# EAGLE board surfboard (EAGLE 4.16)
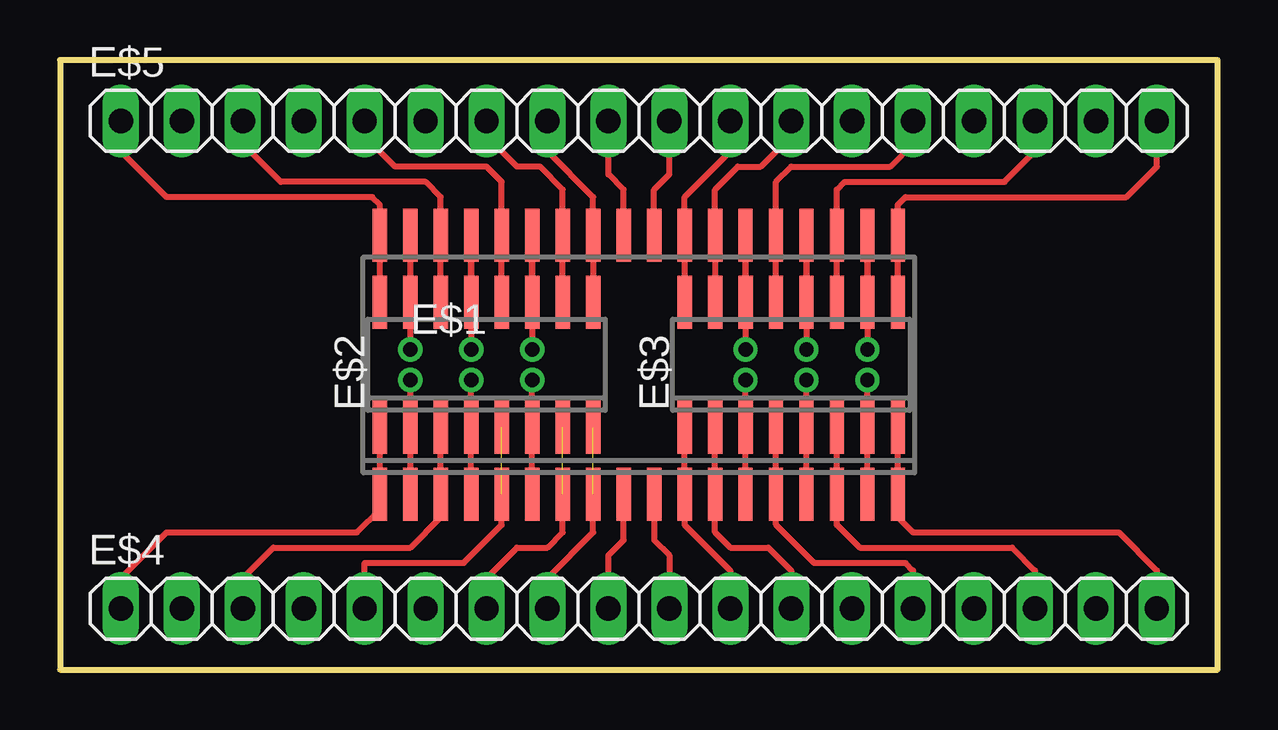
[diagram p0: board, top side]
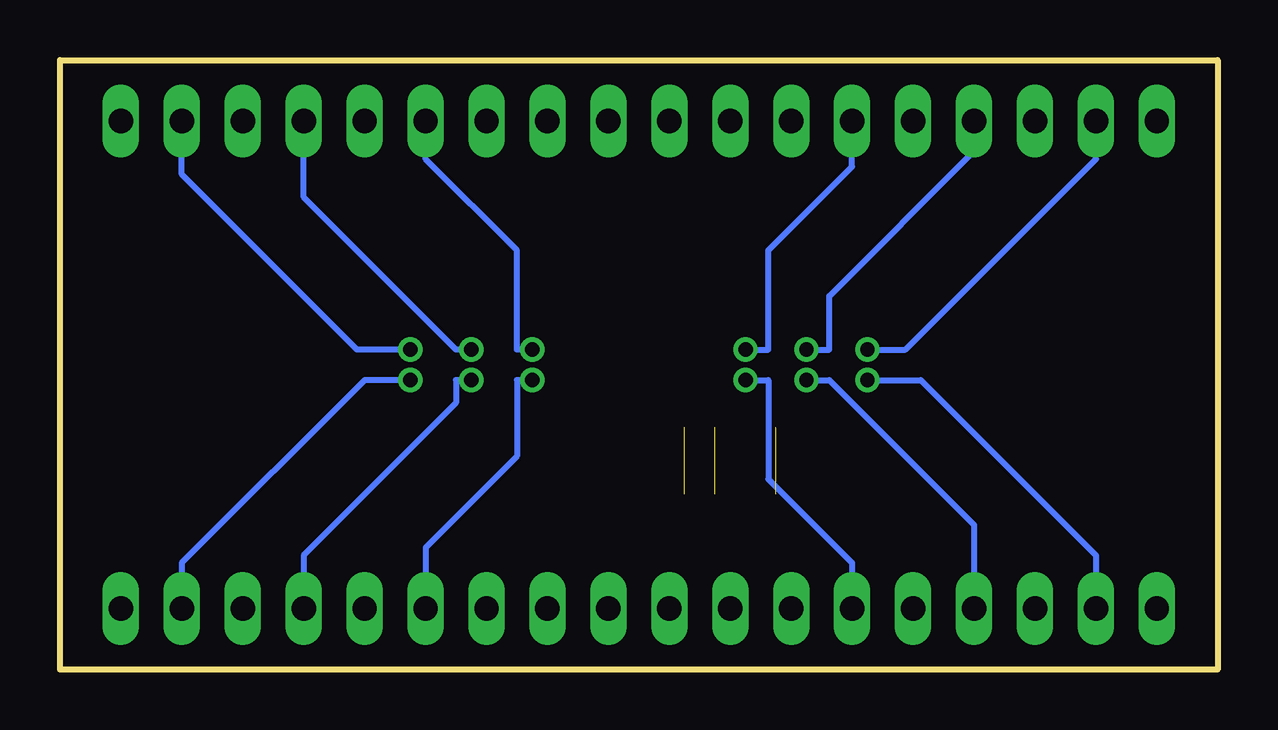
[diagram p1: board, bottom side, seen from below]

Size 48.26 x 25.4 mm. Coordinates in mm from the lower left corner, seen from the top.
Outline: 0,0 48.26,0 48.26,25.4 0,25.4 0,0
Copper layers (1*16): Top 0.035mm / dielectric 1.5mm / Bottom 0.035mm
Design rules "default": minimum track width 10mil, minimum drill 24mil, track to track 8mil, track to pad 8mil, pad to pad 8mil, via to via 8mil, smd to smd 8mil, copper to edge 40mil, drill to drill 8mil, minimum pad ring 10mil, minimum via ring 8mil, stop-mask expansion 4mil, vias tented up to drill 0mil, thermal gap 10mil

## Footprints (pad centres in the part's own frame; a part is rotated, then mirrored left to right if it is on the bottom)
SO36X = smd 0.6 x 2.2: 1 -10.795,-5.4; 2 -9.525,-5.4; 3 -8.255,-5.4; 4 -6.985,-5.4; 5 -5.715,-5.4; 6 -4.445,-5.4; 7 -3.175,-5.4; 8 -1.905,-5.4; 9 -0.635,-5.4; 10 0.635,-5.4; 11 1.905,-5.4; 12 3.175,-5.4; 13 4.445,-5.4; 14 5.715,-5.4; 15 6.985,-5.4; 16 8.255,-5.4; 17 9.525,-5.4; 18 10.795,-5.4; 19 10.795,5.4; 20 9.525,5.4; 21 8.255,5.4; 22 6.985,5.4; 23 5.715,5.4; 24 4.445,5.4; 25 3.175,5.4; 26 1.905,5.4; 27 0.635,5.4; 28 -0.635,5.4; 29 -1.905,5.4; 30 -3.175,5.4; 31 -4.445,5.4; 32 -5.715,5.4; 33 -6.985,5.4; 34 -8.255,5.4; 35 -9.525,5.4; 36 -10.795,5.4
SO16 = smd 0.6 x 2.2: 1 -4.445,-2.6; 2 -3.175,-2.6; 3 -1.905,-2.6; 4 -0.635,-2.6; 5 0.635,-2.6; 6 1.905,-2.6; 7 3.175,-2.6; 8 4.445,-2.6; 9 4.445,2.6; 10 3.175,2.6; 11 1.905,2.6; 12 0.635,2.6; 13 -0.635,2.6; 14 -1.905,2.6; 15 -3.175,2.6; 16 -4.445,2.6
1X18 = drill 1.016 long: 1 -21.59,0; 2 -19.05,0; 3 -16.51,0; 4 -13.97,0; 5 -11.43,0; 6 -8.89,0; 7 -6.35,0; 8 -3.81,0; 9 -1.27,0; 10 1.27,0; 11 3.81,0; 12 6.35,0; 13 8.89,0; 14 11.43,0; 15 13.97,0; 16 16.51,0; 17 19.05,0; 18 21.59,0

## Placement (x,y rotation side)
E$1  [SO36X]  24.13,12.7 0 top
E$2  [SO16]  17.78,12.7 0 top
E$3  [SO16]  30.48,12.7 0 top
E$4  [1X18]  24.13,2.54 0 top
E$5  [1X18]  24.13,22.86 0 top

## Library data of the parts
E$1-E$3 = smd-ipc
E$4 E$5 = pinhead

## Nets
S$1: E$1.9 E$4.9
S$2: E$1.10 E$4.10
S$3: E$1.28 E$5.9
S$4: E$1.27 E$5.10
S$5: E$1.26 E$3.16 E$5.11
S$6: E$1.25 E$3.15 E$5.12
S$7: E$1.29 E$2.9 E$5.8
S$8: E$1.30 E$2.10 E$5.7
S$9: E$1.24 E$3.14 E$5.13
S$10: E$1.31 E$2.11 E$5.6
S$11: E$1.11 E$3.1 E$4.11
S$13: E$1.13 E$3.3 E$4.13
S$15: E$1.12 E$3.2 E$4.12
S$16: E$1.8 E$2.8 E$4.8
S$17: E$1.7 E$2.7 E$4.7
S$18: E$1.6 E$2.6 E$4.6
S$19: E$1.14 E$3.4 E$4.14
S$20: E$1.15 E$3.5 E$4.15
S$21: E$1.1 E$2.1 E$4.1
S$22: E$1.2 E$2.2 E$4.2
S$23: E$1.3 E$2.3 E$4.3
S$24: E$1.4 E$2.4 E$4.4
S$25: E$1.5 E$2.5 E$4.5
S$26: E$1.16 E$3.6 E$4.16
S$27: E$1.17 E$3.7 E$4.17
S$28: E$1.18 E$3.8 E$4.18
S$29: E$1.19 E$3.9 E$5.18
S$30: E$1.20 E$3.10 E$5.17
S$31: E$1.21 E$3.11 E$5.16
S$32: E$1.22 E$3.12 E$5.15
S$33: E$1.23 E$3.13 E$5.14
S$34: E$1.32 E$2.12 E$5.5
S$35: E$1.33 E$2.13 E$5.4
S$36: E$1.34 E$2.14 E$5.3
S$37: E$1.35 E$2.15 E$5.2
S$38: E$1.36 E$2.16 E$5.1

## Tracks (layer width: path | path; a pad name or v marks a point on that pad's centre or on a via)
S$1
  Top 0.254: E$4.9 22.86,4.76 23.5,5.4 E$1.9
S$2
  Top 0.254: E$1.10 24.76,5.4 25.4,4.76 E$4.10
S$3
  Top 0.254: E$1.28 23.5,20 22.86,20.64 E$5.9
S$4
  Top 0.254: E$1.27 24.76,20 25.4,20.64 E$5.10
S$5
  Top 0.254: E$5.11 27.94,21.59 26.04,19.69 E$1.26 E$3.16 26.04,15.24
S$6
  Top 0.254: E$5.12 30.48,22.23 29.21,20.95 28.26,20.95 27.3,20 E$1.25 | E$1.25 27.3,17.46 | 27.3,15.24 E$3.15 E$1.25
S$7
  Top 0.254: E$5.8 20.32,21.59 22.22,19.69 E$1.29 E$2.9 22.22,15.24
S$8
  Top 0.254: E$5.7 17.78,22.23 19.05,20.95 20,20.95 20.96,20 20.96,18.41 | 20.96,17.78 E$1.30 20.96,18.41 | E$2.10 20.96,18.41
S$9  (via drill 0.6)
  Top 0.254: 28.57,15.24 E$3.14 E$1.24 v28.57,13.33
  Bottom 0.254: v28.57,13.33 29.21,13.33 29.21,17.46 33.02,21.27 E$5.13
S$10  (via drill 0.6)
  Top 0.254: 19.68,15.24 E$2.11 E$1.31 v19.68,13.33
  Bottom 0.254: v19.68,13.33 18.73,13.33 18.73,17.46 15.24,20.95 15.24,22.54 15.56,22.86 E$5.6
S$11
  Top 0.254: 26.04,10.16 E$3.1 E$1.11 26.04,6.03 27.94,4.13 E$4.11
S$12
  Top 0.254: 27.3,6.35 27.3,6.98
S$13  (via drill 0.6)
  Top 0.254: E$3.3 E$1.13 v28.57,12.06
  Bottom 0.254: v28.57,12.06 29.21,12.06 29.21,8.89 33.02,5.08 E$4.13
S$15
  Top 0.254: E$4.12 30.48,4.13 29.53,5.08 27.94,5.08 27.3,5.71 E$1.12 E$3.2 27.3,10.16
S$16  (1 unrouted)
  Top 0.254: E$4.8 20.32,3.81 22.22,5.71 E$1.8 22.22,7.62
S$17  (1 unrouted)
  Top 0.254: E$4.7 17.78,3.81 19.05,5.08 20.32,5.08 20.96,5.71 E$1.7
S$18  (via drill 0.6)
  Top 0.254: 19.68,10.16 E$2.6 E$1.6 v19.68,12.06
  Bottom 0.254: v19.68,12.06 18.73,12.06 18.73,7.94 15.24,4.44 E$4.6
S$19
  Top 0.254: E$4.14 35.56,4.13 35.24,4.44 31.43,4.44 29.84,6.03 E$1.14 E$3.4 29.84,10.16
S$20  (via drill 0.6)
  Top 0.254: 31.11,10.16 E$3.5 31.11,9.84 | E$1.15 31.11,9.84 | 31.11,9.84 v31.11,12.06
  Bottom 0.254: v31.11,12.06 31.75,12.06 31.75,11.11 38.1,4.76 E$4.15 38.42,2.22
S$21
  Top 0.254: E$4.1 2.54,3.81 4.44,5.71 12.38,5.71 13.33,6.67 E$1.1 | E$1.1 | 13.33,10.16 E$2.1 E$1.1
S$22  (via drill 0.6)
  Top 0.254: E$2.2 E$1.2 v14.61,12.06
  Bottom 0.254: v14.61,12.06 12.38,12.06 5.08,4.76 E$4.2
S$23
  Top 0.254: E$4.3 7.62,3.81 8.89,5.08 14.61,5.08 15.87,6.35 E$1.3 | E$1.3 15.87,7.62 | 15.87,10.16 E$2.3 E$1.3
S$24  (via drill 0.6)
  Top 0.254: E$2.4 E$1.4 E$2.4 | E$2.4 v17.14,12.06
  Bottom 0.254: v17.14,12.06 16.19,12.06 10.16,6.03 E$4.4 10.16,2.22
S$25  (1 unrouted)
  Top 0.254: E$4.5 12.7,4.44 16.83,4.44 18.41,6.03 E$1.5
S$26
  Top 0.254: E$4.16 40.64,4.13 39.69,5.08 33.34,5.08 32.39,6.03 E$1.16 E$3.6 32.39,10.16
S$27  (via drill 0.6)
  Top 0.254: E$3.7 E$1.17 E$3.7 | E$3.7 v33.66,12.06 33.97,12.06
  Bottom 0.254: v33.66,12.06 35.56,12.06 43.18,4.44 E$4.17
S$28
  Top 0.254: E$4.18 45.72,4.13 44.13,5.71 35.56,5.71 34.92,6.35 E$1.18 E$3.8 34.92,10.16
S$29
  Top 0.254: E$3.9 E$1.19 34.92,19.37 35.24,19.69 44.45,19.69 45.72,20.95 E$5.18
S$30  (via drill 0.6)
  Top 0.254: E$1.20 33.66,18.41 | E$3.10 E$1.20 | E$1.20 v33.66,13.33
  Bottom 0.254: v33.66,13.33 35.88,13.33 43.18,20.64 E$5.17
S$31
  Top 0.254: E$3.11 E$1.21 32.39,20 32.7,20.32 39.37,20.32 40.64,21.59 E$5.16
S$32  (via drill 0.6)
  Top 0.254: E$1.22 31.11,18.41 | E$3.12 E$1.22 | E$1.22 v31.11,13.33
  Bottom 0.254: v31.11,13.33 31.75,13.33 38.1,19.69 E$5.15
S$33
  Top 0.254: E$3.13 E$1.23 29.84,20.32 30.48,20.95 34.61,20.95 35.56,21.91 E$5.14
S$34
  Top 0.254: E$2.12 E$1.32 18.41,20.32 17.78,20.95 13.97,20.95 12.7,22.23 E$5.5
S$35  (via drill 0.6)
  Top 0.254: 17.14,15.24 E$2.13 E$1.33 v17.14,13.33
  Bottom 0.254: v17.14,13.33 16.19,13.33 16.19,15.56 10.16,21.59 E$5.4
S$36
  Top 0.254: E$2.14 E$1.34 15.87,19.69 15.24,20.32 9.21,20.32 7.62,21.91 E$5.3
S$37  (via drill 0.6)
  Top 0.254: 14.61,15.24 E$2.15 E$1.35 v14.61,13.33
  Bottom 0.254: v14.61,13.33 13.02,13.33 5.08,21.27 E$5.2
S$38
  Top 0.254: E$1.36 13.33,18.41 | E$2.16 E$1.36 | E$1.36 13.33,19.37 13.02,19.69 4.44,19.69 2.54,21.59 E$5.1